# Altium PCB Real_Steel_Robotics.PcbDoc
Units mil, origin at the board's own origin, x right, y up, seen from the top; angles counter-clockwise.
Board outline 4734 x 5390.03 mil, 2 copper layers (Top Layer, Bottom Layer); 60 components, 68 nets, 316 pads, 20 vias.
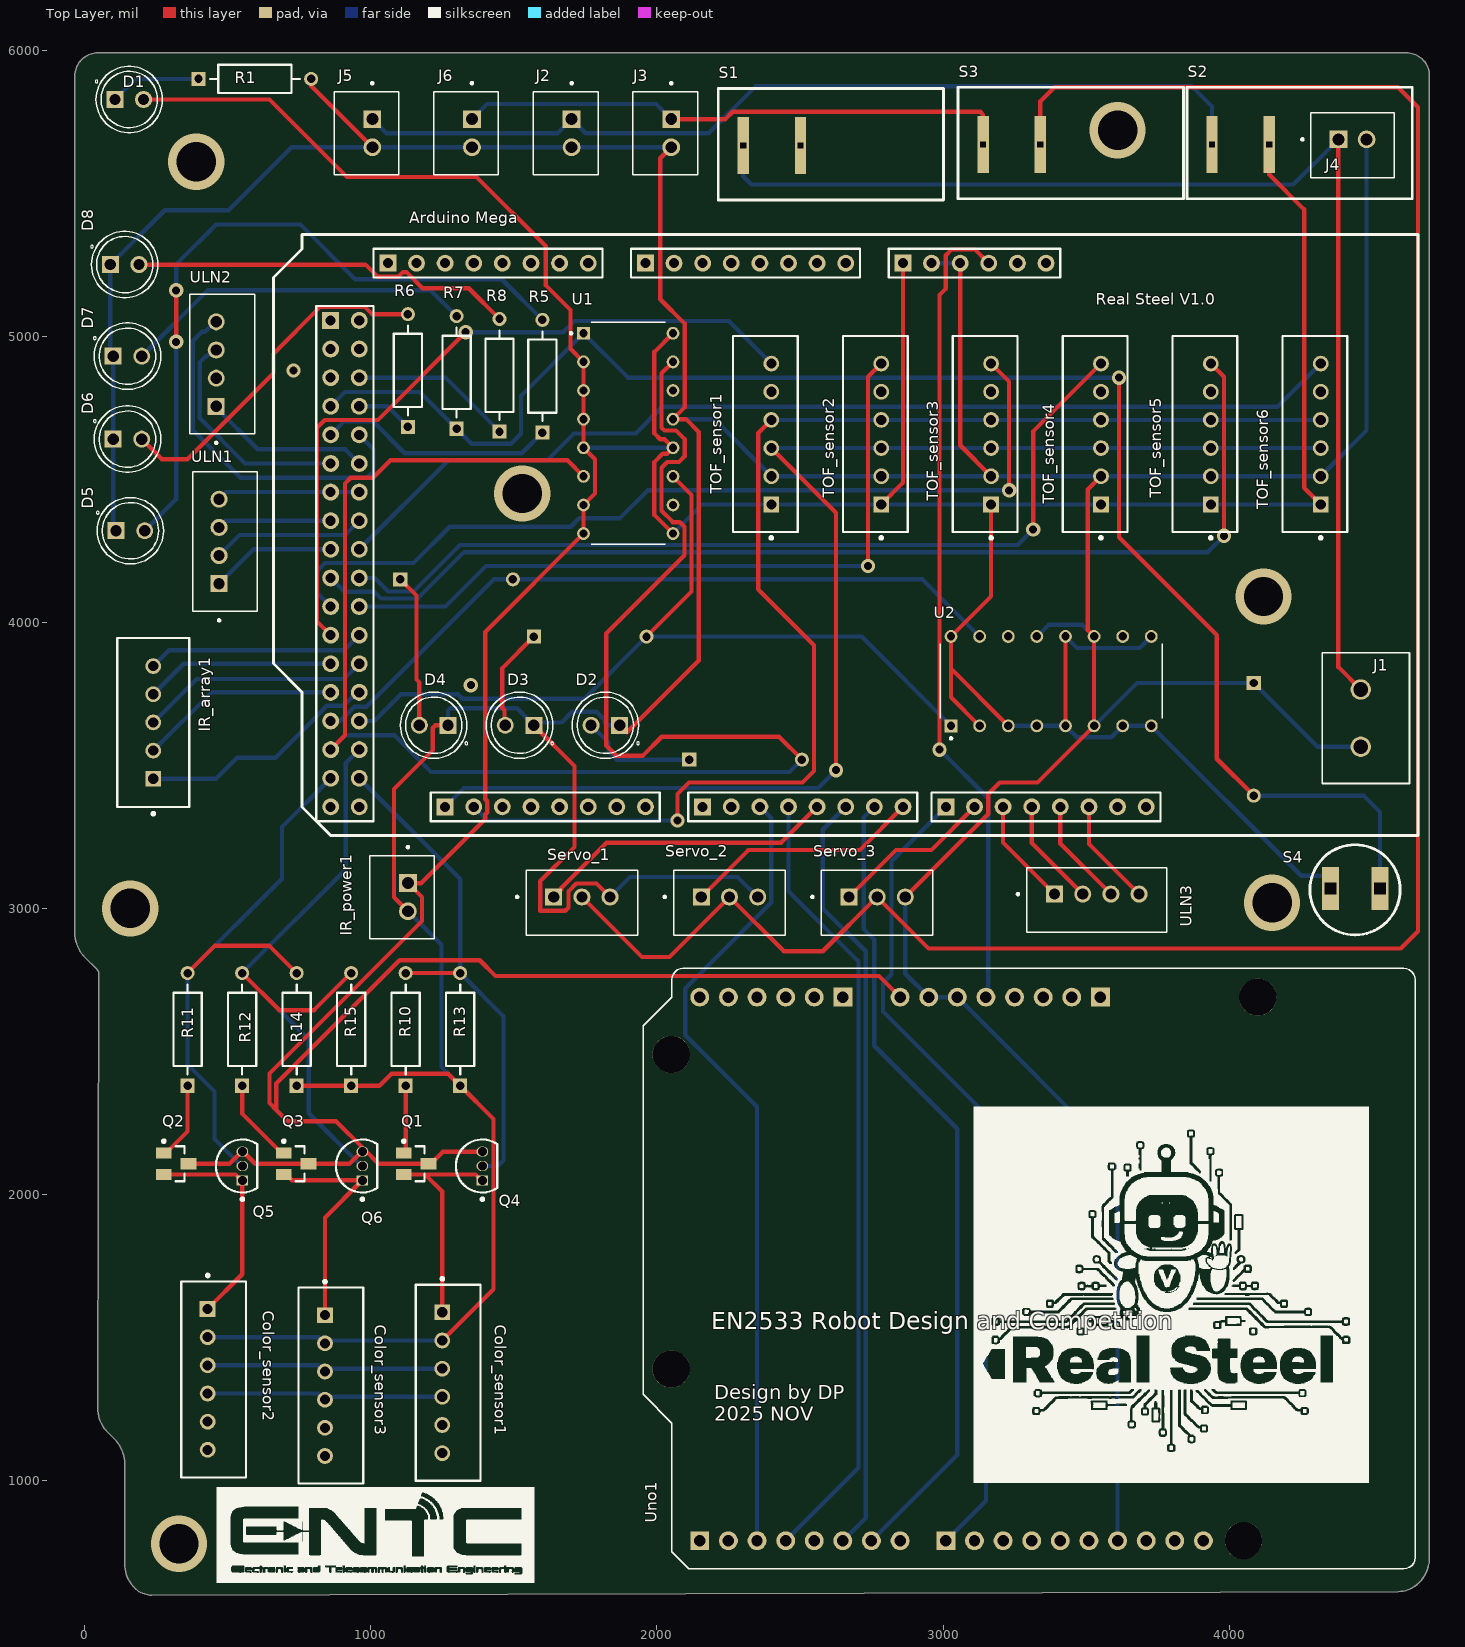
[diagram p0: Top Layer view]
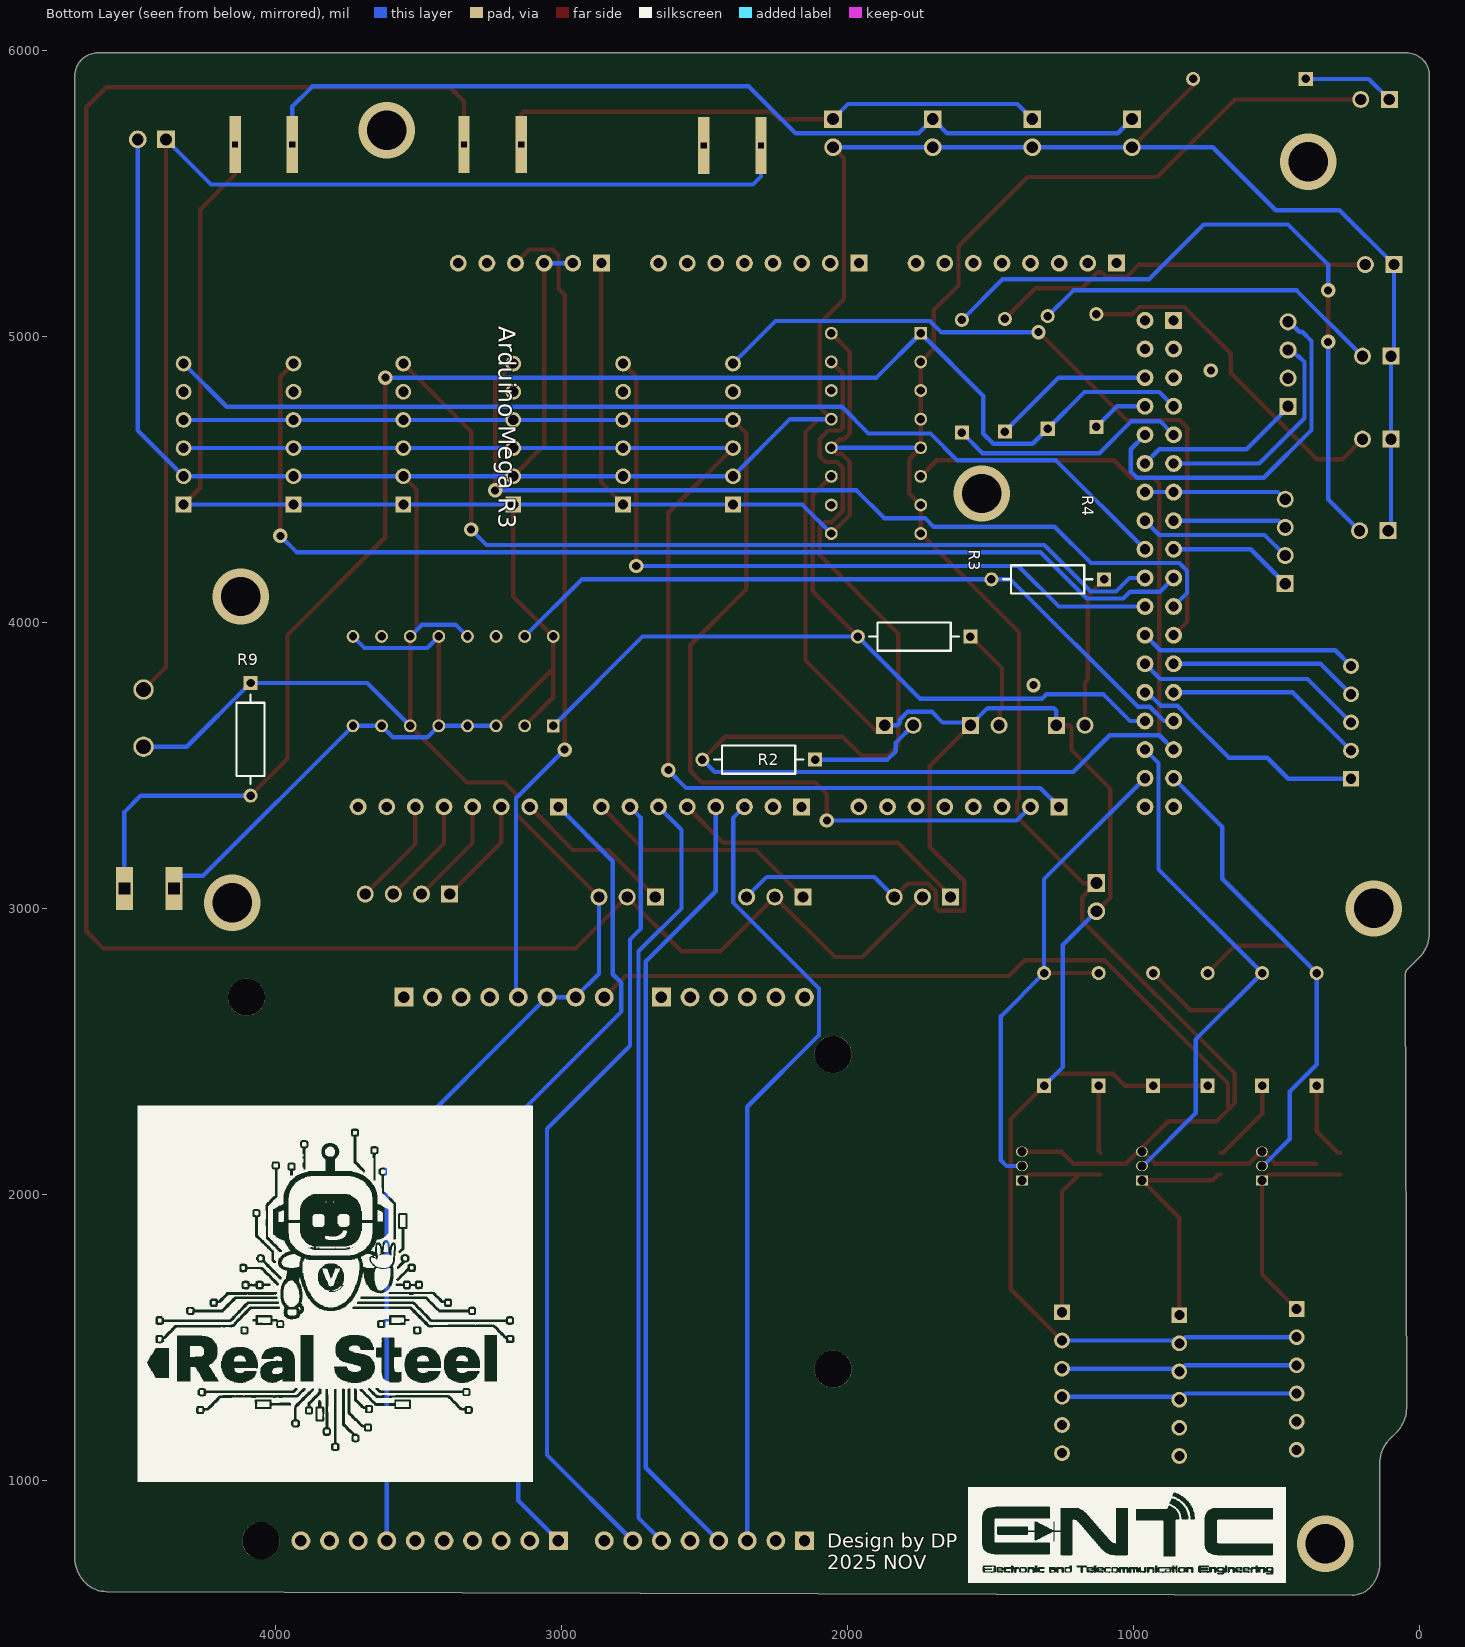
[diagram p1: Bottom Layer view, seen from below]
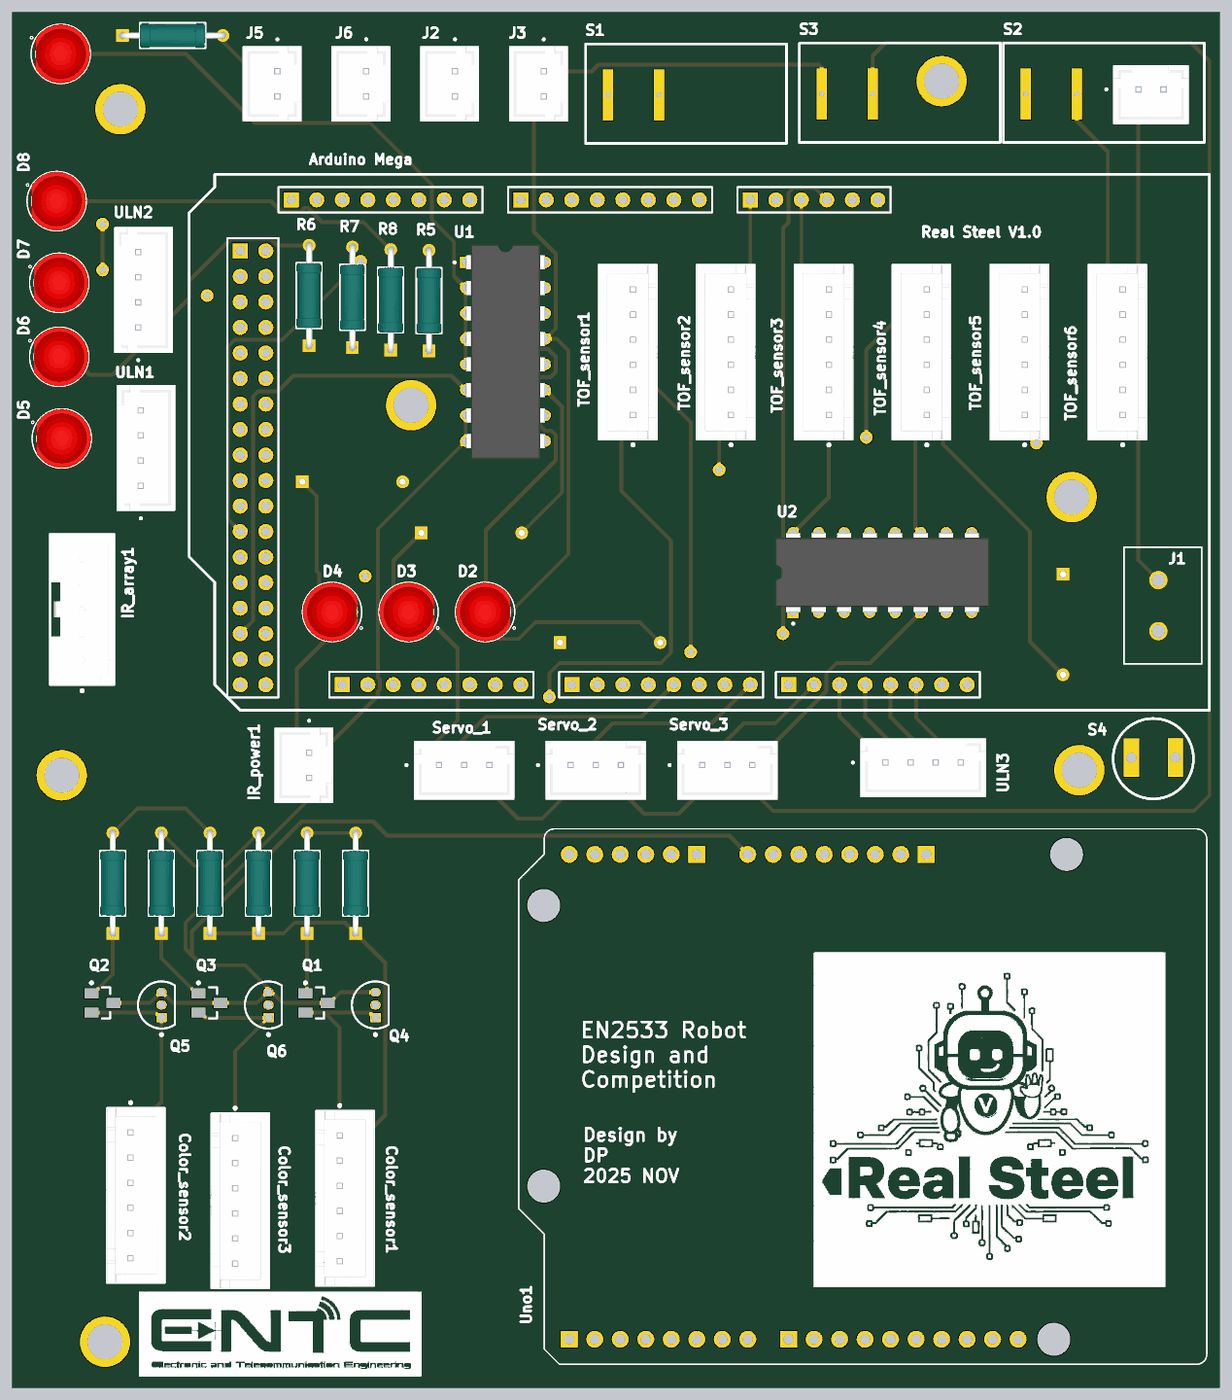
[diagram p2: 3D render of the assembled board from above, using the file's embedded part models]
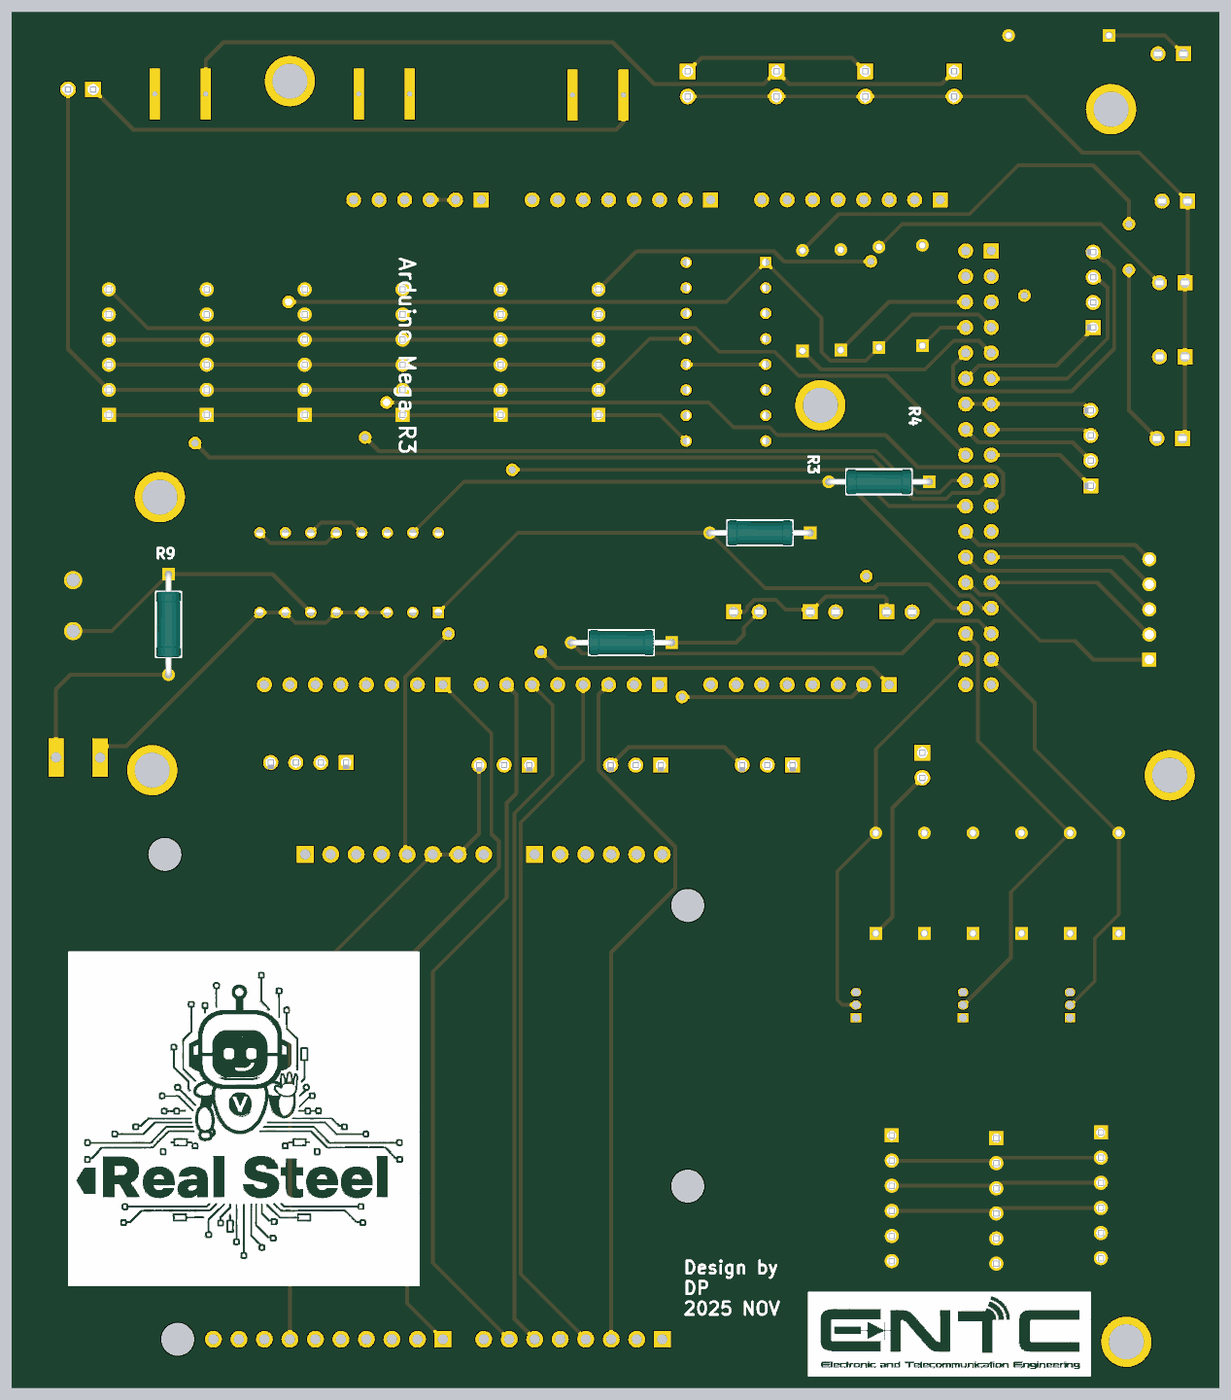
[diagram p3: 3D render of the assembled board from below, using the file's embedded part models]

## Layer stack, top to bottom
Top Solder: solder mask 0.4, Solder Resist, Dk 3.5
Top Layer: signal copper 1.4
Dielectric 1: dielectric 12.6, FR-4, Dk 4.8
Bottom Layer: signal copper 1.4
Bottom Solder: solder mask 0.4, Solder Resist, Dk 3.5

## Board outline
46.02,1253.98 50,2770 ccw(c25.86,2770) 42.93,2787.07 1.38,2828.62 cw(c86.73,2913.98) -33.98,2913.98 -33.98,2914.97 -33.98,5909.98 -34.03,5909.98 cw(c45.97,5909.98) 45.97,5989.98 50,5990 4619.98,5990 4619.98,5990.03 cw(c4619.98,5910.03) 4699.98,5910.03 4699.98,2915 4699.98,729.98 cw(c4579.27,729.98) 4664.62,644.62 4661.98,641.98 cw(c4590.95,713.02) 4590.95,612.56 234.85,600.49 234.85,600 cw(c234.85,684.14) 175.36,624.64 cw(c260.71,710) 140,710 140,1060 ccw(c19.29,1060) 104.64,1145.36 81.38,1168.62 cw(c166.73,1253.98)

## Design rules (kind name [scope] priority, off if disabled: settings)
Clearance [All] p1: gap=10 ignorepadtopadclearanceinfootprint=FALSE
ComponentClearance [All] p1: gap=0 collisioncheckmode=3 verticalgap=0 showdistances=FALSE donotcheckwithout3dbody=TRUE
Height [InComponent('Arduino Mega')] p1: minheight=0 maxheight=10000 prefheight=10000
HoleSize [All] p1: absolutevalues=TRUE maxlimit=393.7 minlimit=0.98 maxpercent=80.000 minpercent=20.000
PolygonConnect [All] p1: connectstyle=Relief reliefconductorwidth=10 reliefentries=4 polygonreliefangle="90 Angle" airgapwidth=10
RoutingVias [All] p1: holewidth=28 width=50 viastyle="Through Hole" minholewidth=28 minwidth=50 maxholewidth=393.7 maxwidth=393.7
SolderMaskExpansion [All] p1: expansion=4 istentingtop=FALSE
SupplyNets "Schematic Supply Nets" [InNet('GND')] p1: voltage=0.000
Width [All] p1: maxlimit=50 minlimit=10 preferedwidth=15
27 further rules are at their usual default settings.

## Components (designator, comment, footprint, x,y, rotation, side; value= is the part's Value field where it differs from the comment)
"Arduino Mega" "Arduino mega" "Arduino mega" 2535,4280 r180 top locked
Color_sensor1 "JST 6 pin" "JST 6 PIN" 1270.67,1342.36 r270 top
Color_sensor2 "JST 6 pin" "JST 6 PIN" 450.67,1353.94 r270 top
Color_sensor3 "JST 6 pin" "JST 6 PIN" 860.67,1332.36 r270 top
D1 "WP7113ID" LED_WP7113ID 156,5827 r0 top
D2 "WP7113ID" LED_WP7113ID 1820,3640 r180 top
D3 "WP7113ID" LED_WP7113ID 1520,3640 r180 top
D4 "WP7113ID" LED_WP7113ID 1220,3640 r180 top
D5 "WP7113ID" LED_WP7113ID 160,4320 r0 top
D6 "WP7113ID" LED_WP7113ID 150,4640 r0 top
D7 "WP7113ID" LED_WP7113ID 150,4930 r0 top
D8 "WP7113ID" LED_WP7113ID 140,5250 r0 top
IR_array1 "B05B-XASK-1(LF)(SN)" "JST 5 PIN" 240,3650 r270 top
IR_power1 "JST 2 PIN" "JST 2 PIN" 1109.33,3039.21 r90 top
J1 "Screw connector terminal block" "Screw Connector" 4500,3670 r270 top
J2 "JST 2 PIN" "JST 2 PIN" 1681.22,5709.21 r90 top
J3 "JST 2 PIN" "JST 2 PIN" 2029.33,5709.21 r90 top
J4 "JST 2 PIN" "JST 2 PIN" 4431,5667 r180 top
J5 "JST 2 PIN" "JST 2 PIN" 985,5709.21 r90 top
J6 "JST 2 PIN" "JST 2 PIN" 1333.11,5709.21 r90 top
Q1 "FDV303N" FAIR-FDV303N-3_V 1158.73,2107.7 r0 top
Q2 "FDV303N" FAIR-FDV303N-3_V 320,2107.7 r0 top
Q3 "FDV303N" FAIR-FDV303N-3_V 739.36,2107.7 r0 top
Q4 "2N7000" ONSC-TO-92-3-29-11 1390,2099.83 r90 top
Q5 "2N7000" ONSC-TO-92-3-29-11 551.27,2099.83 r90 top
Q6 "2N7000" ONSC-TO-92-3-29-11 970.64,2099.83 r90 top
R1 "4.7K Res" "4.7K res" 595,5899 r0 top
R2 "4.7K Res" "4.7K res" 2310,3520 r0 bottom
R3 "4.7K Res" "4.7K res" 1766.85,3950 r0 bottom
R4 "4.7K Res" "4.7K res" 1300,4150 r0 bottom
R5 "4.7K Res" "4.7K res" 1600,4860 r90 top
R6 "4.7K Res" "4.7K res" 1130,4880 r90 top
R7 "4.7K Res" "4.7K res" 1300,4873.15 r90 top
R8 "4.7K Res" "4.7K res" 1450,4863.15 r90 top
R9 "4.7K Res" "4.7K res" 4086,3591 r270 bottom
R10 "4.7K Res" "4.7K res" 1122.1,2577.11 r90 top
R11 "4.7K Res" "4.7K res" 360,2577.11 r90 top
R12 "4.7K Res" "4.7K res" 550.52,2577.11 r90 top
R13 "4.7K Res" "4.7K res" 1312.62,2577.11 r90 top
R14 "4.7K Res" "4.7K res" 741.05,2577.11 r90 top
R15 "4.7K Res" "4.7K res" 931.57,2577.11 r90 top
S1 "On Off Switch" Switch 2612,5676 r180 top
S2 "On Off Switch" Switch 4250,5680 r180 top
S3 "On Off Switch" Switch 3450,5680 r180 top
S4 "Push Botton" "Push botton" 4440,3070 r0 top
Servo_1 "JST 3 PIN" "JST 3 PIN" 1743,3024.33 r180 top
Servo_2 "JST 3 PIN" "JST 3 PIN" 2258.89,3024.33 r180 top
Servo_3 "JST 3 PIN" "JST 3 PIN" 2774.79,3024.33 r180 top
TOF_sensor1 "JST 6 pin" "JST 6 PIN" 2379.33,4658.03 r90 top
TOF_sensor2 "JST 6 pin" "JST 6 PIN" 2763.33,4658.03 r90 top
TOF_sensor3 "JST 6 pin" "JST 6 PIN" 3147.33,4658.03 r90 top
TOF_sensor4 "JST 6 pin" "JST 6 PIN" 3531.33,4658.03 r90 top
TOF_sensor5 "JST 6 pin" "JST 6 PIN" 3915.33,4658.03 r90 top
TOF_sensor6 "JST 6 pin" "JST 6 PIN" 4299.33,4658.03 r90 top
U1 "SN7476N" "SN7476 IC" 1900,4660 r0 top
U2 "SN7476N" "SN7476 IC" 3378,3794.3 r90 top
ULN1 "JST 4 PIN" "JST 4 PIN" 470.67,4277.36 r270 top
ULN2 "JST 4 PIN" "JST 4 PIN" 460.67,4897.36 r270 top
ULN3 "JST 4 PIN" "JST 4 PIN" 3532.64,3049.33 r180 top
Uno1 "ARDUINO_UNO_REV3" ARDUINO_ARDUINO_UNO_REV3 3300.89,1740.82 r180 top locked

## Footprints (in the part's own frame and the unit in brackets; to place one, negate y for a bottom-side part, rotate by r counter-clockwise, add the part's x,y. Pads: shape width x height; smd on the part's side, far side on the other; paste and mask are expansions set on the pad)
"4.7K res" [mm]
  rect 1.25x1.25 hole 0.75 paste-2539.97 mask+0: 1(-5,0)
  round 1.25 hole 0.75 paste-2539.97 mask+0: 2(5,0)
  silkscreen extent -3.97,-1.25 3.97,1.25, body extent -5.72,-1.35 5.72,1.35, height 0.25
"Arduino mega" [mm]
  rect 1.5x1.5 hole 0.9: 0(9.525,23.495) 8(-12.065,23.495) 21(32.385,23.495) 59(-8.255,-24.765) 67(14.605,-24.765) 75(37.465,-24.765) 79(42.545,-19.685)
  round 1.5 hole 0.9: 1(6.985,23.495) 2(4.445,23.495) 3(1.905,23.495) 4(-0.635,23.495) 5(-3.175,23.495) 6(-5.715,23.495) 7(-8.255,23.495) 9(-14.605,23.495) 10(-17.145,23.495) 11(-19.685,23.495) 12(-22.225,23.495) 13(-24.765,23.495) 14(14.605,23.495) 15(17.145,23.495) 16(19.685,23.495) 17(22.225,23.495) 18(24.765,23.495) 19(27.305,23.495) 20(29.845,23.495) 22(40.005,20.955) 23(42.545,20.955) 24(40.005,18.415) 25(42.545,18.415) 26(40.005,15.875) 27(42.545,15.875) 28(40.005,13.335) 29(42.545,13.335) 30(40.005,10.795) 31(42.545,10.795) 32(40.005,8.255) 33(42.545,8.255) 34(40.005,5.715) 35(42.545,5.715) 36(40.005,3.175) 37(42.545,3.175) 38(40.005,0.635) 39(42.545,0.635) 40(40.005,-1.905) 41(42.545,-1.905) 42(40.005,-4.445) 43(42.545,-4.445) 44(40.005,-6.985) 45(42.545,-6.985) 46(40.005,-9.525) 47(42.545,-9.525) 48(40.005,-12.065) 49(42.545,-12.065) 50(40.005,-14.605) 51(42.545,-14.605) 52(40.005,-17.145) 53(42.545,-17.145) 54(-20.955,-24.765) 55(-18.415,-24.765) 56(-15.875,-24.765) 57(-13.335,-24.765) 58(-10.795,-24.765) 60(-3.175,-24.765) 61(-0.635,-24.765) 62(1.905,-24.765) 63(4.445,-24.765) 64(6.985,-24.765) 65(9.525,-24.765) 66(12.065,-24.765) 68(19.685,-24.765) 69(22.225,-24.765) 70(24.765,-24.765) 71(27.305,-24.765) 72(29.845,-24.765) 73(32.385,-24.765) 74(34.925,-24.765) 76(-27.305,23.495) 77(-29.845,23.495) 78(40.005,-19.685) 80(42.545,23.495) 81(40.005,23.495)
  silkscreen extent -53.97,-27.31 47.62,26.04
ARDUINO_ARDUINO_UNO_REV3 [mil]
  round 66 hole 40: 3V3(50.89,-949.18) 5V(150.89,-949.18) A1(750.89,-949.18) A2(850.89,-949.18) A3(950.89,-949.18) A4(1050.89,-949.18) A4_SDA(-509.11,950.81) A5(1150.89,-949.18) A5_SCL(-609.11,950.81) AREF(-409.11,950.82) D1(1050.89,950.82) D2(950.89,950.82) D3(850.89,950.82) D4(750.89,950.82) D5(650.89,950.82) D6(550.89,950.82) D7(450.89,950.82) D9(190.89,950.82) D10(90.89,950.82) D11(-9.11,950.82) D12(-109.11,950.82) D13(-209.11,950.82) GND_1(350.89,-949.18) GND_2(250.89,-949.18) GND_3(-309.11,950.82) IOREF(-149.11,-949.18) RST(-49.11,-949.18) VIN(450.89,-949.18)
  rect 66x66 / inner round 66 / far side rect 66x66 hole 40: A0(650.89,-949.18) D0(1150.89,950.82) D8(290.89,950.82) P1(-249.11,-949.18)
  round 129.92 hole 129.92 unplated: ""(-799.11,-949.19) ""(-749.11,950.81) ""(1250.89,-749.18) ""(1250.89,350.82)
  silkscreen extent -1349,-1049 1349,1049
FAIR-FDV303N-3_V [mm] "SOT23, 3-Leads, Body 3.12x1.50mm, Pitch 0.95mm"
  rect 1.4x1 smd: 1(-1.1,0.95) 2(-1.1,-0.95) 3(1.1,0)
  silkscreen extent -1.22,-1.55 0.75,2.12, body extent -0.75,-1.56 0.75,1.56, height 1.2
"JST 2 PIN" [mm]
  rect 1.575x1.575 / inner round 1.575 / far side rect 1.575x1.575 hole 1.05: 1(1.25,-0.525)
  round 1.575 hole 1.05: 2(-1.25,-0.525)
  silkscreen extent -3.7,-2.88 4.54,2.87, body extent -3.7,-2.88 3.7,2.88, height 7
"JST 3 PIN" [mm]
  rect 1.508x1.508 / inner round 1.508 / far side rect 1.508x1.508 hole 1: 1(2.627,-0.398)
  round 1.508 hole 1: 2(0.127,-0.398) 3(-2.373,-0.398)
  silkscreen extent -4.82,-2.75 5.98,3, body extent -4.82,-2.75 5.08,3, height 7
"JST 4 PIN" [mm]
  rect 1.508x1.508 / inner round 1.508 / far side rect 1.508x1.508 hole 1: 1(3.623,-0.017)
  round 1.508 hole 1: 2(1.123,-0.017) 3(-1.377,-0.017) 4(-3.877,-0.017)
  silkscreen extent -6.33,-2.37 6.97,3.38, body extent -6.33,-2.37 6.07,3.38, height 7
"JST 5 PIN" [mm]
  rect 1.4x1.4 hole 0.9 paste-2539.97 mask+0: 1(5,0)
  round 1.4 hole 0.9 paste-2539.97 mask+0: 2(2.5,0) 3(0,0) 4(-2.5,0) 5(-5,0)
  silkscreen extent -7.5,-3.2 8.22,3.2, body extent -7.6,-3.3 7.6,3.3, height 0.25
"JST 6 PIN" [mm]
  rect 1.4x1.4 hole 0.9 paste-2539.97 mask+0: 1(-6.25,-0.525)
  round 1.4 hole 0.9 paste-2539.97 mask+0: 2(-3.75,-0.525) 3(-1.25,-0.525) 4(1.25,-0.525) 5(3.75,-0.525) 6(6.25,-0.525)
  silkscreen extent -9.35,-2.88 8.7,2.87, body extent -8.8,-2.98 8.8,2.98, height 0.25
LED_WP7113ID [mm]
  round 1.508 hole 1: A(1.27,0)
  rect 1.508x1.508 / inner round 1.508 / far side rect 1.508x1.508 hole 1: C(-1.27,0)
  silkscreen extent -3.03,-2.95 2.95,2.95, body extent -2.5,-2.95 2.95,2.95, height 9.6
ONSC-TO-92-3-29-11 [mm] "TO, 3-Leads, Body Dia 4.7mm, Pitch 1.27mm"
  rect 0.889x1.05 hole 0.8: 1(-1.27,0)
  oval 0.889x1.05 hole 0.8: 2(0,0) 3(1.27,0)
  silkscreen extent -3.07,-1.34 2.35,2.35, body extent -2.35,-1.33 2.36,2.36, height 7.87
"Push botton" [mil]
  rect 60x150 / inner rect 40x200 / far side rect 60x150 hole 40 square: 1(87,0) 2(-86,-1)
  silkscreen extent -157,-162 157,152
"Screw Connector" [mil]
  round 71 / inner round 60 / far side round 71 hole 51 paste-99999 mask+0: 1(-95,-40) 2(105,-40)
  silkscreen extent -224,-175 234,130
"SN7476 IC" [mm]
  rect 1.14x1.14 / inner round 1.14 / far side rect 1.14x1.14 hole 0.74: 1(-3.97,8.89)
  round 1.14 hole 0.74: 2(-3.97,6.35) 3(-3.97,3.81) 4(-3.97,1.27) 5(-3.97,-1.27) 6(-3.97,-3.81) 7(-3.97,-6.35) 8(-3.97,-8.89) 9(3.97,-8.89) 10(3.97,-6.35) 11(3.97,-3.81) 12(3.97,-1.27) 13(3.97,1.27) 14(3.97,3.81) 15(3.97,6.35) 16(3.97,8.89)
  silkscreen extent -5.18,-9.85 3.3,9.85, body extent -3.95,-10.67 3.95,10.67, height 5.08
Switch [mil]
  rect 40x200 hole 20 square: 1(310,10) 2(110,10)
  silkscreen extent -390,-190 397,200

## Part data
Color_sensor1 Color_sensor2 Color_sensor3 TOF_sensor1 TOF_sensor2 TOF_sensor3 TOF_sensor4 TOF_sensor5 TOF_sensor6: "Header B6B-ZR, 1.50mm, 6-contacts, top entry, THT, /2000/box", Manufacturer=JST, Manufacturer Part Number=B6B-ZR, Supplier Part Number=455-B6B-ZR-ND, Category="Board to Board Connectors", ComponentLink1Description=https://datasheet.ciiva.com/6905/zhconnector-6905949.pdf?src-supplier=Digikey, ComponentLink1URL=https://datasheet.ciiva.com/6905/zhconnector-6905949.pdf?src-supplier=Digikey, Pricing="1=0.2, 10=0.168, 100=0.143, 500=0.12762, 2000=0.11571, 6000=0.10707, 10000=0.10328 (USD)", RoHS=Yes, Stock=39862, Supplier=Digikey
D1 D2 D3 D4 D5 D6 D7 D8: "Red 617nm LED Indication - Discrete 2V Radial", Package="Radial Kingbright", Availability="In Stock", Check_prices=https://www.snapeda.com/parts/WP7113ID/Kingbright/view-part/?ref=eda, MF=Kingbright, MP=WP7113ID, Price=None, Purchase-URL=https://pricing.snapeda.com/search/part/WP7113ID/?ref=eda, SnapEDA_Link=https://www.snapeda.com/parts/WP7113ID/Kingbright/view-part/?ref=snap
IR_array1: library part "JST 5 PIN", "CONN HEADER VERT 5POS 2.5MM", Color=Beige, Contact Resistance=10mR, Current Rating=3A, Flammability Rating="UL94 V-0", Insulation Color=Natural, Insulation Resistance=1GR, Max Operating Temperature=85°C, Min Operating Temperature=-25°C, Voltage Rating=250V, Connector Type=Header, Contact Finish - Mating=TIN, Contact Material="Copper Alloy", Contact Plating=Tin, Contact Shape=Circular, Contact Type="Male Pin", Fastening Type=Ramp, Gender=Male, Height=8.8mm, Insulation Material=Nylon, Lead Free="Lead Free", Lead Length=3.4mm, Length=15mm, Mated Stacking Heights=11.3mm, Material=Nylon, Mount="Through Hole", Number of Contacts=5, Number of Pins=5, Number of Poles=5, Number of Positions=5, Number of Rows=1, Orientation=Straight, Packaging=Bulk, Pitch=2.5mm, REACH SVHC="No SVHC", Series=XA, Termination=Solder, Voltage Rating (AC)=250V, Voltage Rating (DC)=250V, Width=6.4mm, Wire/Cable Gauge=20AWG
IR_power1 J2 J3 J4 J5 J6: "Connector Header Through Hole 2 position 0.098 (2.50mm)", Package=None, Check_prices=https://www.snapeda.com/parts/B2B-XH-A%20(LF)(SN)/JST+Sales+America+Inc./view-part/?ref=eda, MF="JST Sales", MP="B2B-XH-A (LF)(SN)", SnapEDA_Link=https://www.snapeda.com/parts/B2B-XH-A%20(LF)(SN)/JST+Sales+America+Inc./view-part/?ref=snap
Q1 Q2 Q3: library part CMP-2000-05111-1, "N-Channel MOSFET Transistor, 8 V VGSS, 25 V VDSS, 0.68 A, -55 to 150 degC, 3-Pin SOT23, RoHS, Tape and Reel", Manufacturer=Fairchild, Maximum Continuous Drain Current=0.68A, Maximum Drain Source Voltage=25V, Maximum Gate Source Voltage=8V, Operating Temperature=-55to150degC, Package=3SOT-23, Category=MOSFET, Channel Mode=Enhancement, Channel Type=N, Datasheet URL=https://datasheet.ciiva.com/22681/1845307-22681736.pdf, Datasheet Version="Rev. D2, 07/2014", Manufacturer URL=https://www.fairchildsemi.com/, Mounting=SurfaceMount, Packaging=Tape&Reel, Rad Hard=No, RDS-on=450@4.5VmOhm, Typical Fall Time=13ns, Typical Rise Time=8.5ns, Typical Turn-Off Delay Time=17ns, Typical Turn-On Delay Time=3ns
Q4 Q5 Q6: library part CMP-1058-00936-1, "Small Signal MOSFET, 200 mA, 60 V, N-Channel, 3-Pin TO-92, Bulk Box", Manufacturer="On Semiconductor", Package Type=TO-92, Channel Polarity="N Channel", Ciss Typ (pF)=60, ComponentLink1Description="Manufacturer URL", ComponentLink1URL=http://www.onsemi.com/, ComponentLink2Description=Datasheet, ComponentLink2URL=http://www.onsemi.com/pub_link/Collateral/2N7000-D.PDF, ComponentLink3Description="Package Specification", ComponentLink3URL=http://www.onsemi.cn/pub_link/Collateral/2N6426-D.PDF, Configuration=Single, Coss Typ (pF)=25, Crss Typ (pF)=5, DatasheetVersion="Rev. 8", ID Max (A)=0.2, Mounting Technology="Through Hole", PackageDescription="3-Pin Transistor Outline, Body 4.825 x 3.685 mm, Pitch 1.27 mm", PackageReference=TO-92-3-29-11_AM_SL, PackageVersion="Rev. AM", Packing="Bulk Box", PartNumber=2N7000, PD Max (W)=0.35, V(BR)DSS Min (V)=60, VGS Max (V)=20, VGS(th) Max (V)=3
U1 U2: "Flip Flops Dual J-K Positive-Edge-Triggered Flip-Flops with Preset and Clear 16-PDIP 0 to 70", Package="PDIP-16 Texas Instruments", Check_prices=https://www.snapeda.com/parts/SN7476N/Texas+Instruments/view-part/?ref=eda, MF="Texas Instruments", MP=SN7476N, SnapEDA_Link=https://www.snapeda.com/parts/SN7476N/Texas+Instruments/view-part/?ref=snap
Uno1: "Microcontroller board based on the ATmega328P.", Package="Non-Standard Arduino", Check_prices=https://www.snapeda.com/parts/ARDUINO%20UNO%20REV3/Arduino/view-part/?ref=eda, MF=Arduino, MP="ARDUINO UNO REV3", SnapEDA_Link=https://www.snapeda.com/parts/ARDUINO%20UNO%20REV3/Arduino/view-part/?ref=snap

## Via types
v1: diameter 50, hole 28, Top Layer to Bottom Layer, 13 vias
v2: diameter 196.85, hole 137.8, Top Layer to Bottom Layer, 7 vias

## Nets (pads, with @x,y where several pads share a name; then routed paths per layer and width w, separated by ;. In a path a pad name is that pad's centre, name@x,y a point inside that pad or via, vN(x,y) a via of type N, cw(c..) or ccw(c..) an arc to the next point about the centre after c; other vN are vias at no path point)
5V: "Arduino Mega.59" D1.A IR_power1.1 Q1.3 Q2.3 Q3.3 Q4.3 Q5.3 Q6.3 S2.2 S4.2 TOF_sensor1.1 TOF_sensor2.1 TOF_sensor3.1 TOF_sensor4.1 TOF_sensor5.1 TOF_sensor6.1 U1.2 U1.3 U1.4 U1.5 U1.7 U1.8 U1.9 U1.12 U1.16 U2.2 U2.3 U2.4 U2.5 U2.7 U2.8 U2.9 U2.12 U2.16 Uno1.VIN | length 18126.2
  Top Layer w15: D1.A 646,5827 917,5556 1370,5556 1612,5314 1612,5177 1698,5091 1698,4955.7 U1.2 U1.3 U1.4 U1.5 1784,4569.7 1784,4450.3 U1.7 U1.8 1400,3966.3 1400,3381.51 1407.03,3374.48 1407.03,3335.52 1400,3328.49 1400,3312 1176.42,3088.42 IR_power1.1 1179,3039.42 1179,2956 646,2423 646,2320 670,2296 ; Q2.3 505.98,2107.7 548.1,2149.83 Q5.3 554.44,2149.83 596.57,2107.7 Q3.3 925.34,2107.7 967.47,2149.83 Q6.3 Q6.3@977.76,2156.95 ; Q4.3 1252.03,2149.83 1209.91,2107.7 Q1.3 1027,2107.7 Q6.3@977.76,2156.95 ; U1.9 1991.36,4374.94 1991.36,4560 2020.84,4589.48 2035.78,4589.48 U1.12 2026.86,4639.44 2011.92,4639.44 1991.36,4660 1991.36,4945.06 U1.16 ; TOF_sensor2.1 2860,4487.97 2860,5255 ; Uno1.VIN 2776,2764 1436,2764 1381,2819 1101,2819 670,2388 670,2296 ; U2.2 3028,3738 3028,3838 ; TOF_sensor3.1 3168,4090.6 U2.16 3028,3838 ; U2.3 3028,3838 ; U2.5 U2.12 ; S2.2 4140,5565 4262,5443 4262,4469.97 TOF_sensor6.1 ; 670,2296 710,2256 878.7,2256 Q6.3@977.76,2156.95
  Bottom Layer w15: U1.5 U1.12 ; U1.9 2158.27,4411.97 TOF_sensor1.1 TOF_sensor2.1 TOF_sensor3.1 TOF_sensor4.1 TOF_sensor5.1 TOF_sensor6.1 ; U2.3 U2.4 U2.5 3468,3598 3588,3598 U2.7 U2.8 4252,3114 4354,3114 S4.2 ; U2.12 3468.6,3910 3687.4,3910 U2.9
6V: S3.2 Servo_1.2 Servo_2.2 Servo_3.2 | length 7752.5
  Top Layer w15: Servo_1.2 1948,2830 2043.89,2830 Servo_2.2 2443.89,2850 2579.79,2850 Servo_3.2 2949.79,2860 4600,2860 4660,2920 4660,5800 4590,5870 3390,5870 3340,5820 S3.2
12V: S1.2
D2: "Arduino Mega.2" Uno1.D2 | length 2809.4
  Bottom Layer w15: Uno1.D2 2350,2306.62 2099.5,2557.12 2099.5,2720.45 2399.51,3020.46 2399.51,3315.49 2360,3355
D3: "Arduino Mega.3" Uno1.D3 | length 2772.1
  Bottom Layer w15: Uno1.D3 2705,1045 2705,2815 2460,3060 2460,3355
D4: "Arduino Mega.4" Servo_1.1 | length 1053.9
  Top Layer w15: Servo_1.1 1665.81,3066.24 1665.81,3071.41 1823.79,3229.38 2434.38,3229.38 2560,3355
D5: "Arduino Mega.5" Uno1.D5 | length 2693.4
  Bottom Layer w15: Uno1.D5 2730,870 2730,2850 2580,3000 2580,3275 2660,3355
D6: "Arduino Mega.6" Uno1.D6 | length 2840.4
  Bottom Layer w15: Uno1.D6 3050,1090 3050,2230 2760,2520 2760,2891.07 2722.6,2928.47 2722.6,3317.6 2760,3355
D7: "Arduino Mega.7" Servo_2.1 | length 835
  Top Layer w15: Servo_2.1 2319.85,3204.38 2709.38,3204.38 2860,3355
D8: "Arduino Mega.8" Uno1.D8 | length 2863.2
  Bottom Layer w15: Uno1.D8 3150,930 3150,2280 2790,2640 2790,2740 2820,2770 2820,3165 3010,3355
D9: "Arduino Mega.9" Servo_3.1 | length 569.1
  Top Layer w15: Servo_3.1 2835.74,3204.38 2959.38,3204.38 3110,3355
D10: "Arduino Mega.10" ULN3.1 | length 379.6
  Top Layer w15: 3210,3355 3210,3230 ULN3.1
D11: "Arduino Mega.11" ULN3.2 | length 378.9
  Top Layer w15: 3310,3355 3310,3228.43 ULN3.2
D12: "Arduino Mega.12" ULN3.3 | length 378.3
  Top Layer w15: 3410,3355 3410,3226.85 ULN3.3
D13: "Arduino Mega.13" ULN3.4 | length 377.6
  Top Layer w15: 3510,3355 3510,3225.28 ULN3.4
D22: "Arduino Mega.22" Q4.2 R10.2 R13.2 | length 1816.3
  Top Layer w15: R10.2 R13.2
  Bottom Layer w15: 960,3455 1312.62,3102.38 R13.2 1463.79,2622.79 1463.79,2120 1443.62,2099.83 Q4.2
D23: "Arduino Mega.23" Q5.2 R11.2 R14.2 | length 2104
  Top Layer w15: R11.2 456.04,2870 645.01,2870 R14.2
  Bottom Layer w15: Q5.2 548.1,2099.83 454.18,2193.75 454.18,2360.03 360,2454.22 R11.2 690,3103.96 690,3285 860,3455
D24: "Arduino Mega.24" Q6.2 R12.2 R15.2 | length 2289
  Top Layer w15: R12.2 680,2644.48 802.1,2644.48 R15.2
  Bottom Layer w15: 960,3555 912.97,3507.97 912.97,3136.4 R12.2 783.16,2541.33 783.16,2284.14 967.47,2099.83 Q6.2
D25: "Arduino Mega.25" R2.2 U1.6 U1.15 | length 5970.8
  Top Layer w15: 860,3555 910,3605 910,4485 930,4505 1008,4505 1069,4566 1687.7,4566 U1.6 ; U1.15 2016.36,4870.06 2016.36,4680 2026.36,4670 2067,4670 2097,4640 2097,4580 2077,4560 2036.36,4560 2016.36,4540 2016.36,4389.58 2056,4349.94 2080,4349.94 2096.24,4333.7 2096.24,4234.24 1822.81,3960.81 1822.81,3569.19 1858,3534 1951,3534 2017,3600 2426.85,3600 R2.2
  Bottom Layer w15: 860,3555 910,3605 1083,3605 1211,3477 2463.85,3477 R2.2
D26: "Arduino Mega.26" R3.2 U1.11 U2.1 | length 2984
  Top Layer w15: R3.2 2121.24,4107.54 2121.24,4445.06 U1.11
  Bottom Layer w15: 960,3655 1012.21,3655 1105.21,3748 1305,3748 1320,3733 1746.7,3733 R3.2 2716,3950 U2.1
D27: "Arduino Mega.27" R4.2 U2.15 | length 2555.6
  Bottom Layer w15: 860,3655 893.49,3655 943.49,3705 985,3705 1430,4150 R4.2 2928.6,4150 U2.15
D28: "Arduino Mega.28" IR_array1.1 | length 846.1
  Bottom Layer w15: IR_array1.1 459.21,3453.15 532.63,3526.58 666.93,3526.58 812.97,3672.62 812.97,3674.48 846.47,3707.97 904.17,3707.97 931.88,3735.68 940.68,3735.68 960,3755
D29: "Arduino Mega.29" IR_array1.2 | length 704.3
  Bottom Layer w15: IR_array1.2 443.42,3755 860,3755
D30: "Arduino Mega.30" IR_array1.3 | length 804.9
  Bottom Layer w15: IR_array1.3 392.03,3802.03 907.03,3802.03 960,3855
D31: "Arduino Mega.31" IR_array1.4 | length 664.1
  Bottom Layer w15: IR_array1.4 346.57,3855 860,3855
D32: "Arduino Mega.32" IR_array1.5 | length 764.8
  Bottom Layer w15: IR_array1.5 295.18,3902.03 907.03,3902.03 960,3955
D33: "Arduino Mega.33" TOF_sensor1.6 | length 2549.1
  Top Layer w15: 860,3955 812,4003 812,4680 839,4707 1025,4707 v1(1332,5014)
  Bottom Layer w15: v1(1332,5014) 1673,5014 1712,5053 2251.1,5053 TOF_sensor1.6
D34: "Arduino Mega.34" TOF_sensor2.6 | length 2563
  Top Layer w15: v1(2738,4197) 2738,4858.1 TOF_sensor2.6
  Bottom Layer w15: 960,4055 1261,4055 1403,4197 v1(2738,4197)
D35: "Arduino Mega.35" TOF_sensor3.6 | length 3148.1
  Top Layer w15: TOF_sensor3.6 3231,4841.1 v1(3231,4461)
  Bottom Layer w15: 860,4055 812.97,4102.03 812.97,4179.97 840,4207 1149,4207 1276,4334 1699,4334 1729,4364 1871,4364 1968,4461 v1(3231,4461)
D36: "Arduino Mega.36" TOF_sensor4.6 | length 3142.3
  Top Layer w15: v1(3315,4324) 3315,4667.1 TOF_sensor4.6
  Bottom Layer w15: 960,4155 1013.93,4155 1061.04,4107.89 1149.89,4107.89 1312.06,4270.06 3261.06,4270.06 v1(3315,4324)
D37: "Arduino Mega.37" TOF_sensor5.6 | length 3863.8
  Top Layer w15: TOF_sensor5.6 3982,4858.1 v1(3982,4302)
  Bottom Layer w15: 860,4155 908,4107 1011.93,4107 1036.04,4082.89 1163.89,4082.89 1326.06,4245.06 3925.06,4245.06 v1(3982,4302)
D38: "Arduino Mega.38" TOF_sensor6.6 | length 3628.9
  Bottom Layer w15: 960,4255 1270.93,4565.93 1615.93,4565.93 1710,4660 1926,4660 2019,4753 4168.9,4753 TOF_sensor6.6
D39: "Arduino Mega.39" ULN1.1 | length 439.8
  Bottom Layer w15: ULN1.1 590.28,4255 860,4255
D40: "Arduino Mega.40" ULN1.2 | length 540.5
  Bottom Layer w15: ULN1.2 541.85,4305 910,4305 960,4355
D41: "Arduino Mega.41" ULN1.3 | length 399.7
  Bottom Layer w15: ULN1.3 493.43,4355 860,4355
D42: "Arduino Mega.42" "Arduino Mega.43" ULN1.4 | length 500.4
  Bottom Layer w15: ULN1.4 495,4455 860,4455 960,4455
D43: "Arduino Mega.44" ULN2.1 | length 587.5
  Bottom Layer w15: ULN2.1 457.64,4752.36 605,4605 910,4605 960,4555
D44: ULN2.2
D45: "Arduino Mega.45" ULN2.3 | length 794
  Bottom Layer w15: ULN2.3 447.99,4951.57 424.03,4927.61 420.76,4927.61 402.81,4909.66 402.81,4712.81 560.63,4555 860,4555
D46: "Arduino Mega.46" ULN2.4 | length 1280.1
  Bottom Layer w15: ULN2.4 455.33,5050 420.76,5015.43 410.16,5015.43 377.81,4983.09 377.81,4672.19 545,4505 988,4505 1010,4527 1010,4605 960,4655
D47: "Arduino Mega.47" R5.1 | length 836.2
  Bottom Layer w15: 860,4655 908,4703 1007,4703 1119.07,4590.93 1527.78,4590.93 R5.1
D48: "Arduino Mega.48" R6.1 | length 199.8
  Bottom Layer w15: 960,4755 1058.15,4755 R6.1
D49: "Arduino Mega.49" R7.1 R9.2 S4.1 U1.1 | length 5540
  Top Layer w15: v1(3615,4855) 3615,4297 3957,3955 3957,3523.15 R9.2
  Bottom Layer w15: 860,4755 910,4805 1171.3,4805 R7.1 1352.3,4624 1490,4624 1525,4659 1525,4791.3 U1.1 1898.7,4855 v1(3615,4855) ; R9.2 4470,3394.15 4527,3337.15 S4.1
D50: "Arduino Mega.50" R8.1 | length 568.2
  Bottom Layer w15: 960,4855 1261.3,4855 R8.1
GND: "Arduino Mega.57" "Arduino Mega.58" Color_sensor1.2 Color_sensor2.2 Color_sensor3.2 D2.C D3.C D4.C D5.C D6.C D7.C D8.C IR_power1.2 J1.2 J2.2 J3.2 J4.2 J5.2 J6.2 R1.2 R9.1 R13.1 R14.1 R15.1 Servo_1.3 Servo_2.3 Servo_3.3 TOF_sensor1.2 TOF_sensor2.2 TOF_sensor3.2 TOF_sensor4.2 TOF_sensor5.2 TOF_sensor6.2 U1.13 U2.6 U2.11 U2.13 Uno1.GND_1 Uno1.GND_2 Uno1.GND_3 | length 22279.8
  Top Layer w15: R14.1 R15.1 1030.27,2380.26 1072.37,2422.36 1270.52,2422.36 R13.1 1429,2263.88 1429,1669 Color_sensor1.2 ; R1.2 791.85,5873.82 J5.2 ; IR_power1.2 1081,3039 1081,3417.11 1217.19,3553.29 1217.19,3631.21 1225.97,3640 D4.C ; D3.C 1712,3498 1712,3215 1592,3095 1592,2992 1680,2992 1690.81,3002.81 1690.81,3059.55 1718.45,3087.19 1789.24,3087.19 Servo_1.3 ; D2.C 1895,3615 2146.24,3866.24 2146.24,4665.12 2101.36,4710 U1.13 2097,4750.7 2097,5044 2012,5129 2012,5622 J3.2 ; Servo_3.3 3158,3329.79 3158,3400 3198,3440 3330,3440 U2.6 U2.11 3506,3972.6 3506,4464.39 TOF_sensor4.2 ; 3060,5255 3060,4618.39 TOF_sensor3.2
  Bottom Layer w15: D5.C 100,4330 D6.C D7.C 90,4940 D8.C 280,5440 503.27,5440 723.27,5660 J5.2 J6.2 J2.2 J3.2 ; Color_sensor2.2 818.43,1501.57 Color_sensor3.2 850,1490 Color_sensor1.2 ; IR_power1.2 1247,2873 1247,2445.88 R13.1 ; D4.C 1270,3691.21 1278.79,3700 1510,3700 D3.C 1580,3650 1667.27,3650 1704.46,3687.19 1789.54,3687.19 1817.19,3659.54 1817.19,3648.79 1825.97,3640 D2.C ; Servo_1.3 1906.43,3110 2282.32,3110 Servo_2.3 ; U1.13 2200.39,4710 TOF_sensor1.2 TOF_sensor2.2 TOF_sensor3.2 TOF_sensor4.2 TOF_sensor5.2 TOF_sensor6.2 4480.21,4670.61 J4.2 ; Servo_3.3 2868.21,2771.79 Uno1.GND_1 Uno1.GND_2 3610,2130 Uno1.GND_3 ; 2960,5255 3060,5255 ; U2.13 3368.4,3991 3487.6,3991 U2.11 ; U2.6 3677.85,3787.85 R9.1 4308.85,3565 J1.2
NetColor_sensor1_1: Color_sensor1.1 Q1.2 Q4.1 | length 789.8
  Top Layer w15: Q1.2 1190,2070.3 ; Color_sensor1.1 1250,2010.3 1190,2070.3 ; Q4.1 1386.83,2049.83 1366.36,2070.3 1190,2070.3
NetColor_sensor2_1: Color_sensor2.1 Q2.2 Q5.1 | length 783.1
  Top Layer w15: Q2.2 527.63,2070.3 548.1,2049.83 Q5.1 551.27,1721.27 Color_sensor2.1
NetColor_sensor3_1: Color_sensor3.1 Q3.2 Q6.1 | length 808.6
  Top Layer w15: Q3.2 703.93,2070.3 724.4,2049.83 Q6.1 840,1919.19 Color_sensor3.1
NetD1_C: D1.C R1.1 | length 322
  Bottom Layer w15: D1.C 178,5899 R1.1
NetD2_A: D2.A R2.1 | length 410.4
  Bottom Layer w15: D2.A 1830.62,3579.38 1830.62,3549.38 1860,3520 R2.1
NetD3_A: D3.A R3.1 | length 359.7
  Top Layer w15: D3.A 1467.5,3642.5 1467.5,3692.19 1460,3699.69 1460,3840 R3.1
NetD4_A: D4.A R4.1 | length 537.7
  Top Layer w15: R4.1 1160,4093.15 1160,3799.83 1170,3789.83 D4.A
NetD5_A: D5.A R5.2 | length 2451.5
  Top Layer w15: v1(320,4980) v1(320,5160)
  Bottom Layer w15: D5.A 320,4430 v1(320,4980) ; v1(320,5160) 320,5250 460,5390 754.55,5390 945.55,5199 1457.85,5199 R5.2
NetD6_A: D6.A R6.2 | length 1229.7
  Top Layer w15: D6.A 270,4570 359.39,4570 659.9,4870.51 659.9,4938.71 823.22,5102.03 979.48,5102.03 1004.66,5076.85 R6.2
NetD7_A: D7.A R7.2 | length 1232.5
  Bottom Layer w15: D7.A 430,5160 1210,5160 R7.2
NetD8_A: D8.A R8.2 | length 1373.2
  Top Layer w15: D8.A@180.44,5250 981.2,5250 1023.22,5207.97 1096.78,5207.97 1112.44,5223.63 1124.86,5223.63 1180.93,5167.56 1342.44,5167.56 R8.2
  Bottom Layer w15: D8.A D8.A@202.01,5250
NetJ1_1: J1.1 J4.1 S1.1 | length 4219.8
  Top Layer w15: J4.1 4381.79,3843.21 J1.1
  Bottom Layer w15: S1.1 2302,5558 2330,5530 4224.12,5530 J4.1
NetJ2_1: J2.1 J5.1 S2.1 | length 3225.7
  Bottom Layer w15: J5.1 1055.1,5709 1652.46,5709 J2.1 1751.32,5709 2181,5709 2345,5873 3870,5873 3940,5803 S2.1
NetJ3_1: J3.1 J6.1 S3.1 | length 1948.5
  Top Layer w15: J3.1 2239.43,5758.43 2265,5784 3130,5784 3140,5774 S3.1
  Bottom Layer w15: J6.1 1406.35,5811 1997.43,5811 J3.1
NetLabel20: "Arduino Mega.55"
NetLabel21: "Arduino Mega.56" Uno1.5V | length 2858.7
  Top Layer w15: v1(2988,3555) 2988,5144 3010,5166 3010,5283 3030,5303 3112,5303 3160,5255
  Bottom Layer w15: v1(2988,3555) 3158,3385 3158,2694 3150,2694 Uno1.5V
NetQ1_1: Q1.1 R10.1 | length 237.9
  Top Layer w15: Q1.1 1122.1,2151.79 R10.1
NetQ2_1: Q2.1 R11.1 | length 274.3
  Top Layer w15: Q2.1 284.57,2145.11 360,2220.54 R11.1
NetQ3_1: Q3.1 R12.1 | length 300
  Top Layer w15: R12.1 550.52,2282.76 688.18,2145.11 Q3.1
SCL1: "Arduino Mega.21" TOF_sensor1.3 TOF_sensor2.3 TOF_sensor3.3 TOF_sensor4.3 TOF_sensor5.3 TOF_sensor6.3 | length 4558.5
  Top Layer w15: TOF_sensor1.3 2626,4382.82 v1(2626,3483)
  Bottom Layer w15: 1260,3355 1326,3421 2564,3421 v1(2626,3483) ; TOF_sensor1.3 TOF_sensor2.3 TOF_sensor3.3 TOF_sensor4.3 TOF_sensor5.3 TOF_sensor6.3
SCL2: Color_sensor1.3 Color_sensor2.3 Color_sensor3.3 | length 833.1
  Bottom Layer w15: Color_sensor2.3 818.42,1403.15 Color_sensor3.3 850,1391.57 Color_sensor1.3
SDA1: "Arduino Mega.20" TOF_sensor1.4 TOF_sensor2.4 TOF_sensor3.4 TOF_sensor4.4 TOF_sensor5.4 TOF_sensor6.4 | length 4582.1
  Top Layer w15: v1(2072,3307) 2072,3400 2112,3440 2509,3440 2549,3480 2549,3920 2354,4115 2354,4661.24 TOF_sensor1.4
  Bottom Layer w15: 1360,3355 1408,3307 v1(2072,3307) ; TOF_sensor1.4 TOF_sensor2.4 TOF_sensor3.4 TOF_sensor4.4 TOF_sensor5.4 TOF_sensor6.4
SDA2: Color_sensor1.4 Color_sensor2.4 Color_sensor3.4 | length 833.1
  Bottom Layer w15: Color_sensor2.4 818.43,1304.72 Color_sensor3.4 850,1293.15 Color_sensor1.4
pads on no net: "Arduino Mega.0" "Arduino Mega.1" "Arduino Mega.14" "Arduino Mega.15" "Arduino Mega.16" "Arduino Mega.17" "Arduino Mega.18" "Arduino Mega.19" "Arduino Mega.51" "Arduino Mega.52" "Arduino Mega.53" "Arduino Mega.54" "Arduino Mega.60" "Arduino Mega.61" "Arduino Mega.62" "Arduino Mega.63" "Arduino Mega.64" "Arduino Mega.65" "Arduino Mega.66" "Arduino Mega.67" "Arduino Mega.68" "Arduino Mega.69" "Arduino Mega.70" "Arduino Mega.71" "Arduino Mega.72" "Arduino Mega.73" "Arduino Mega.74" "Arduino Mega.75" "Arduino Mega.76" "Arduino Mega.77" "Arduino Mega.78" "Arduino Mega.79" "Arduino Mega.80" "Arduino Mega.81" Color_sensor1.5 Color_sensor1.6 Color_sensor2.5 Color_sensor2.6 Color_sensor3.5 Color_sensor3.6 TOF_sensor1.5 TOF_sensor2.5 TOF_sensor3.5 TOF_sensor4.5 TOF_sensor5.5 TOF_sensor6.5 U1.10 U1.14 U2.10 U2.14 Uno1. Uno1.3V3 Uno1.A0 Uno1.A1 Uno1.A2 Uno1.A3 Uno1.A4 Uno1.A4_SDA Uno1.A5 Uno1.A5_SCL Uno1.AREF Uno1.D0 Uno1.D1 Uno1.D4 Uno1.D7 Uno1.D9 Uno1.D10 Uno1.D11 Uno1.D12 Uno1.D13 Uno1.IOREF Uno1.P1 Uno1.RST
copper on no net:
  other v1: 1350,3780 730,4880
  other v2: 330,780 160,3000 4150,3020 4120,4090 1530,4450 390,5610 3610,5720

## Silkscreen, mask and mechanical layers (free items; w line width, h text height)
Top Overlay:
  drawing of 79 lines, arcs and shapes, not listed
  text "Real Steel V1.0" at 3533.42,5110.01 h40
  text "EN2533 Robot Design and Competition" at 2190,1530 h60
  text "Design by DP / 2025 NOV" at 2200,1210 h50
Bottom Overlay:
  drawing of 95 lines, arcs and shapes, not listed
  text "Design by DP / 2025 NOV" at 2070,690 h50
Mechanical 1:
  lines w10: -34.03,5909.98 cw(c45.97,5909.98) 45.97,5989.98 ; -33.98,5819.98 -33.98,2824.97 -33.98,2913.98 ccw(c86.73,2913.98) 1.38,2828.62 42.93,2787.07 cw(c25.86,2770) 50,2770 46.02,1253.98 ccw(c166.73,1253.98) 81.38,1168.62 104.64,1145.36 cw(c19.29,1060) 140,1060 140,710 ccw(c260.71,710) 175.36,624.64 ccw(c234.85,684.14) 234.85,600 ; 50,5990 4619.98,5990 ; 234.85,600.49 4590.95,612.56 ccw(c4590.95,713.02) 4661.98,641.98 4664.62,644.62 ccw(c4579.27,729.98) 4699.98,729.98 4699.98,732.38 4699.98,2858.23 4699.98,2915 4699.98,5910.03 ccw(c4619.98,5910.03) 4619.98,5990.03

## Text inside footprints (layer, text, board x,y; h text height)
"Arduino Mega": Bottom Overlay "Arduino Mega R3" at 3218,5034 h60 r90